# EAGLE board micromouse6.3 (EAGLE 7.5.0)
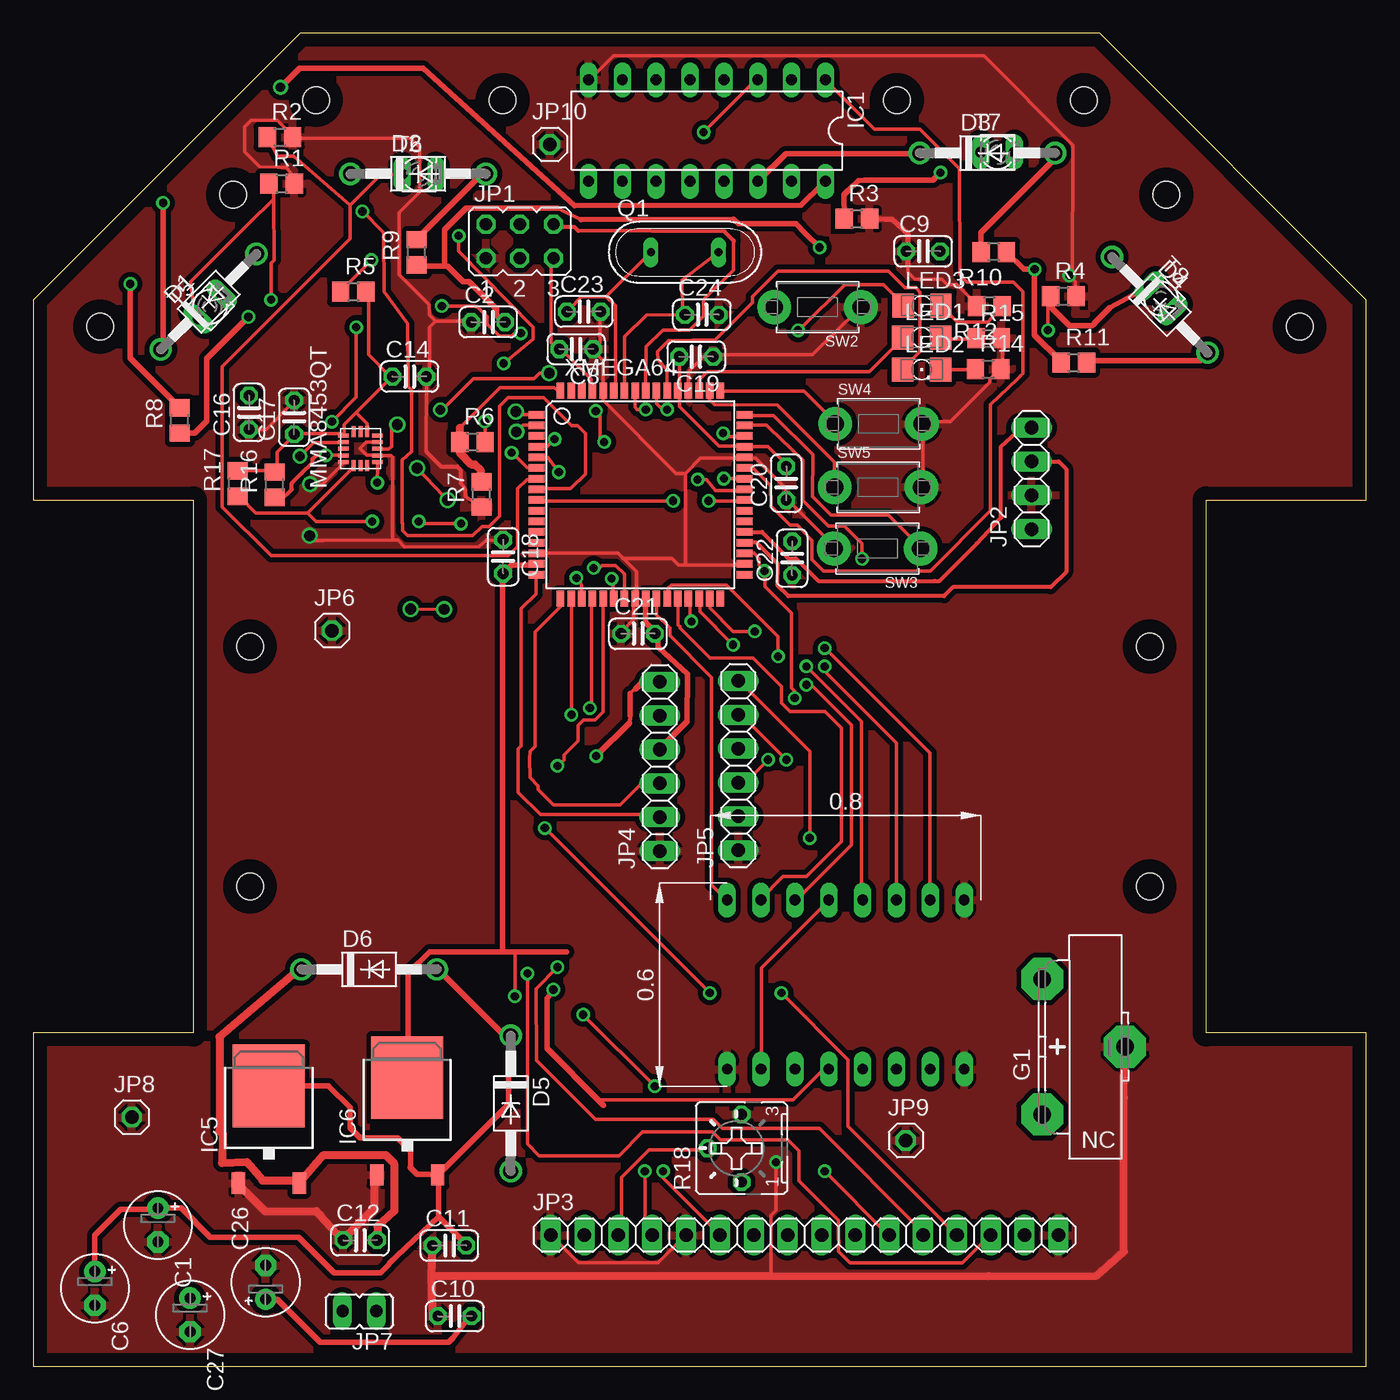
[diagram p0: board, top side]
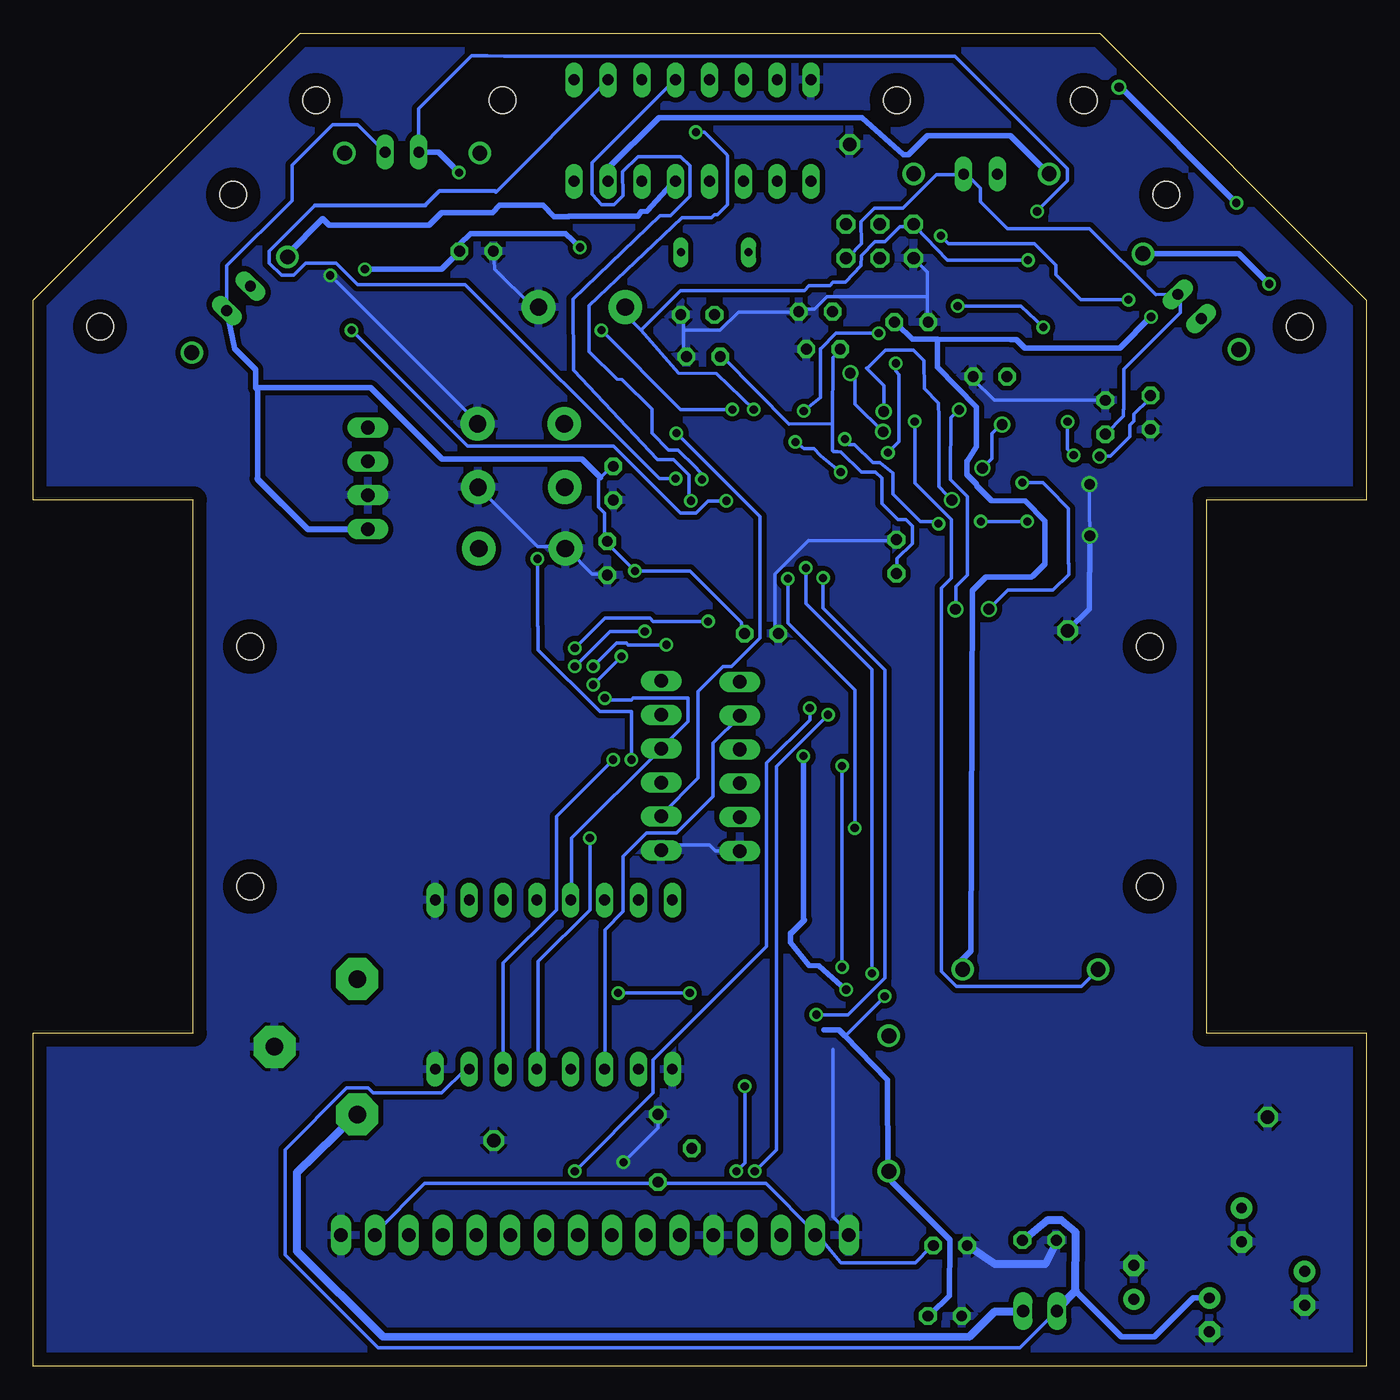
[diagram p1: board, bottom side, seen from below]

Size 100 x 100 mm. Coordinates in mm from the lower left corner, seen from the top.
Outline: 0,0 100,0 100,25 88,25 88,65 100,65 100,80 80,100 20,100 0,80 0,65 12,65 12,25 0,25 0,0
Copper layers (1*16): Top 0.035mm / dielectric 1.5mm / Bottom 0.035mm
Design rules "default *": minimum track width 10mil, minimum drill 24mil, track to track 15mil, track to pad 10mil, pad to pad 10mil, via to via 10mil, smd to smd 5mil, copper to edge 40mil, drill to drill 8mil, minimum pad ring 10mil, minimum via ring 8mil, stop-mask expansion 4mil, vias tented up to drill 0mil, thermal gap 10mil
Holes 2 mm at 95,78 85,87.9 78.8,95 64.8,95 21.2,95 35.2,95 5,78 15,87.9 83.75,54 83.75,36 16.25,54 16.25,36

## Footprints (pad centres in the part's own frame; a part is rotated, then mirrored left to right if it is on the bottom)
MMA8453QT = smd 0.813 x 0.305: BYP -1.275,0.5; DNC -1.275,0; GND1 -1.275,-1; GND2 1.275,0.5; GND3 1.275,-0.5; INT1 1.275,0; INT2 1.275,-1; NC3 1.275,1; SCL -1.275,-0.5; VDDIO -1.275,1 | smd 0.305 x 0.813: NC1 -0.5,1.275; NC2 0,1.275; NC4 0.5,-1.275; SA0 0,-1.275; SDA -0.5,-1.275; VDD 0.5,1.275
E2,5-5 = drill 0.813 pad 1.6: + -1.27,0 | drill 0.813 pad 1.6 octagon: - 1.27,0
C025-024X044 = drill 0.813 octagon: 1 -1.27,0; 2 1.27,0
DO41-10 = drill 1.118: A 5.08,0; C -5.08,0
1V60R = drill 1.321 pad 3.15 octagon: + -2.54,-5.08; +@1 -2.54,5.08; - 3.683,0
DIL16 = drill 0.813 long: 1 -8.89,-3.81; 2 -6.35,-3.81; 3 -3.81,-3.81; 4 -1.27,-3.81; 5 1.27,-3.81; 6 3.81,-3.81; 7 6.35,-3.81; 8 8.89,-3.81; 9 8.89,3.81; 10 6.35,3.81; 11 3.81,3.81; 12 1.27,3.81; 13 -1.27,3.81; 14 -3.81,3.81; 15 -6.35,3.81; 16 -8.89,3.81
TO252 = smd 1 x 1.6: 1 -2.28,-4.8; 2 2.28,-4.8 | smd 5.4 x 6.2: TAB 0,2.5
JP3Q = drill 0.914 octagon: 1 -2.54,-1.27; 2 -2.54,1.27; 3 0,-1.27; 4 0,1.27; 5 2.54,-1.27; 6 2.54,1.27
1X04 = drill 1.016 long: 1 -3.81,0; 2 -1.27,0; 3 1.27,0; 4 3.81,0
1X16 = drill 1.016 long: 1 -19.05,0; 2 -16.51,0; 3 -13.97,0; 4 -11.43,0; 5 -8.89,0; 6 -6.35,0; 7 -3.81,0; 8 -1.27,0; 9 1.27,0; 10 3.81,0; 11 6.35,0; 12 8.89,0; 13 11.43,0; 14 13.97,0; 15 16.51,0; 16 19.05,0
1X06 = drill 1.016 long: 1 -6.35,0; 2 -3.81,0; 3 -1.27,0; 4 1.27,0; 5 3.81,0; 6 6.35,0
1X01 = drill 1.016 octagon: 1 0,0
JP1 = drill 0.914 long: 1 0,-1.27; 2 0,1.27
1206 = smd 1.6 x 1.803: A -1.422,0; C 1.422,0
QS = drill 0.61 long: 1 -2.54,0; 2 2.54,0
R0805 = smd 1.3 x 1.5: 1 -0.95,0; 2 0.95,0
B25P = drill 0.813 octagon: A -2.54,0; E 2.54,0; S 0,2.54
TACT_PANA-EVQ = drill 1.3 pad 2.54: P$1 -3.25,0; P$2 3.25,0
BPX81 = drill 0.813 long: C 1.27,0; E -1.27,0
POLULU713 = drill 0.8 long: P$1 -13.97,3.81; P$2 -13.97,1.27; P$3 -13.97,-1.27; P$4 -13.97,-3.81; P$5 -13.97,-6.35; P$6 -13.97,-8.89; P$7 -13.97,-11.43; P$8 -13.97,-13.97; P$9 -1.27,-13.97; P$10 -1.27,-11.43; P$11 -1.27,-8.89; P$12 -1.27,-6.35; P$13 -1.27,-3.81; P$14 -1.27,-1.27; P$15 -1.27,1.27; P$16 -1.27,3.81
TQFP64 = smd 1.194 x 0.559: 1 -7.8,6; 2 -7.8,5.2; 3 -7.8,4.4; 4 -7.8,3.6; 5 -7.8,2.8; 6 -7.8,2; 7 -7.8,1.2; 8 -7.8,0.4; 9 -7.8,-0.4; 10 -7.8,-1.2; 11 -7.8,-2; 12 -7.8,-2.8; 13 -7.8,-3.6; 14 -7.8,-4.4; 15 -7.8,-5.2; 16 -7.8,-6; 33 7.8,-6; 34 7.8,-5.2; 35 7.8,-4.4; 36 7.8,-3.6; 37 7.8,-2.8; 38 7.8,-2; 39 7.8,-1.2; 40 7.8,-0.4; 41 7.8,0.4; 42 7.8,1.2; 43 7.8,2; 44 7.8,2.8; 45 7.8,3.6; 46 7.8,4.4; 47 7.8,5.2; 48 7.8,6 | smd 0.559 x 1.194: 17 -6,-7.8; 18 -5.2,-7.8; 19 -4.4,-7.8; 20 -3.6,-7.8; 21 -2.8,-7.8; 22 -2,-7.8; 23 -1.2,-7.8; 24 -0.4,-7.8; 25 0.4,-7.8; 26 1.2,-7.8; 27 2,-7.8; 28 2.8,-7.8; 29 3.6,-7.8; 30 4.4,-7.8; 31 5.2,-7.8; 32 6,-7.8; 49 6,7.8; 50 5.2,7.8; 51 4.4,7.8; 52 3.6,7.8; 53 2.8,7.8; 54 2,7.8; 55 1.2,7.8; 56 0.4,7.8; 57 -0.4,7.8; 58 -1.2,7.8; 59 -2,7.8; 60 -2.8,7.8; 61 -3.6,7.8; 62 -4.4,7.8; 63 -5.2,7.8; 64 -6,7.8

## Placement (x,y rotation side)
ACC1  MMA8453QT  [MMA8453QT]  24.54,68.83 0 top
C1  [E2,5-5]  9.35,10.59 270 top
C2  [C025-024X044]  34.13,78.33 0 top
C6  [E2,5-5]  4.62,5.84 270 top
C8  100n  [C025-024X044]  40.73,76.31 180 top
C9  [C025-024X044]  66.76,83.65 0 top
C10  10μ  [C025-024X044]  31.61,3.76 0 top
C11  100n  [C025-024X044]  31.21,9.05 0 top
C12  100n  [C025-024X044]  24.52,9.45 0 top
C14  4,7μ  [C025-024X044]  28.22,74.25 0 top
C16  0.1μ  [C025-024X044]  16.18,71.55 90 top
C17  0.1μ  [C025-024X044]  19.57,71.19 90 top
C18  100n  [C025-024X044]  35.25,60.74 270 top
C19  100n  [C025-024X044]  49.73,75.74 180 top
C20  100n  [C025-024X044]  56.49,66.25 90 top
C21  100n  [C025-024X044]  45.37,54.96 0 top
C22  100n  [C025-024X044]  56.94,60.62 90 top
C23  15p  [C025-024X044]  41.3,79.12 0 top
C24  15p  [C025-024X044]  50.16,78.89 0 top
C26  [E2,5-5]  17.43,6.29 90 top
C27  [E2,5-5]  11.76,3.85 270 top
D1  sfh4550  [DO41-10]  13.15,79.87 45 top
D2  sfh4550  [DO41-10]  28.87,89.46 0 top
D3  sfh4550  [DO41-10]  71.58,91.02 0 top
D4  sfh4550  [DO41-10]  84.52,79.63 315 top
D5  1N4004  [DO41-10]  35.82,19.71 270 top
D6  1N4004  [DO41-10]  25.19,29.77 0 top
G1  1V60R  [1V60R]  78.23,23.96 0 top
IC1  ULN2003AN  [DIL16]  50.54,92.7 180 top
IC5  LM1117IDTX-3.3  [TO252]  17.67,18.53 0 top
IC6  LM1117IDTX-3.3  [TO252]  28.05,19.15 0 top
JP1  [JP3Q]  36.5,84.41 0 top
JP2  [1X04]  74.89,66.61 90 top
JP3  [1X16]  57.86,9.84 0 top
JP4  [1X06]  47,45 90 top
JP5  [1X06]  52.89,45.06 90 top
JP6  [1X01]  22.41,55.19 0 top
JP7  [JP1]  24.47,4.13 90 top
JP8  [1X01]  7.39,18.68 0 top
JP9  [1X01]  65.46,16.93 0 top
JP10  [1X01]  38.76,91.67 0 top
LED1  [1206]  66.65,77.18 0 top
LED2  [1206]  66.65,74.77 0 top
LED3  [1206]  66.67,79.55 0 top
Q1  [QS]  48.88,83.57 0 top
R1  1k  [R0805]  18.63,88.73 0 top
R2  1k  [R0805]  18.5,92.21 0 top
R3  1k  [R0805]  61.79,86.09 0 top
R4  1k  [R0805]  77.28,80.27 0 top
R5  10k  [R0805]  24.01,80.61 0 top
R6  20k  [R0805]  32.95,69.35 0 top
R7  10k  [R0805]  33.62,65.4 90 top
R8  10  [R0805]  11,70.95 90 top
R9  10  [R0805]  28.76,83.56 90 top
R10  10  [R0805]  72.06,83.6 180 top
R11  10  [R0805]  78.06,75.3 0 top
R12  220  [R0805]  71.73,79.53 180 top
R14  220  [R0805]  71.64,74.82 0 top
R15  220  [R0805]  71.68,77.11 0 top
R16  4.7k  [R0805]  18.09,66.13 90 top
R17  4.7k  [R0805]  15.34,66.22 90 top
R18  [B25P]  53.14,16.35 90 top
SW2  [TACT_PANA-EVQ]  58.84,79.46 180 top
SW3  [TACT_PANA-EVQ]  63.33,61.35 180 top
SW4  [TACT_PANA-EVQ]  63.42,70.7 0 top
SW5  [TACT_PANA-EVQ]  63.38,65.95 0 top
T5  BPX81  [BPX81]  13.26,79.5 46.1 top
T6  BPX81  [BPX81]  28.93,89.44 0 top
T7  BPX81  [BPX81]  72.35,91.09 0 top
T8  BPX81  [BPX81]  84.6,80.12 314 top
U$1  POLULU713  [POLULU713]  55.87,36.25 90 top
XMEGA64  [TQFP64]  45.55,65.39 0 top

## Library data of the parts
ACC1 = MMA8453QT
C1 C2 C6 C8-C12 C14 C16-C24 C26 C27 R1-R12 R14-R17 = rcl
D1-D6 = diode
G1 = battery
IC1 = uln-udn
IC5 IC6 = lm1117
JP1 JP7 = jumper
JP2-JP6 JP8-JP10 = pinhead
LED1-LED3 = led
Q1 = special
R18 = pot
SW2-SW5 = adafruit
T5-T8 = opto-trans-siemens; OC_FARNELL: unknown; OC_NEWARK: unknown
U$1 = polulu
XMEGA64 = atmega-atxmega

## Nets
A_IN1: U$1.P$14 XMEGA64.27
A_IN2: U$1.P$15 XMEGA64.28
A_PWM: U$1.P$16 XMEGA64.26
AIN: R6.1 R7.2 XMEGA64.64
B_IN1: U$1.P$12 XMEGA64.30
B_IN2: U$1.P$11 XMEGA64.31
B_PWM: U$1.P$10 XMEGA64.29
CLK: JP1.2 R5.1 SW2.P$2 XMEGA64.57
CLK_: JP2.3 XMEGA64.36
DATA: JP1.6 XMEGA64.56
FOTRA1: R1.1 T5.E XMEGA64.6
FOTRA2: R2.1 T6.E XMEGA64.7
FOTRA3: R3.1 T7.E XMEGA64.8
FOTRA4: R4.1 T8.E XMEGA64.9
GND: ACC1.GND1 ACC1.GND2 ACC1.GND3 C1.- C2.1 C6.- C8.1 C9.1 C10.1 C11.1 C12.1 C14.2 C16.1 C17.2 C18.1 C19.1 C20.1 C21.1 C22.1 C23.2 C24.2 C26.- C27.- G1.- IC1.8 IC5.1 IC6.1 JP1.1 JP2.2 JP3.1 JP3.5 JP3.16 JP4.1 JP5.1 JP6.1 JP8.1 JP9.1 JP10.1 R1.2 R2.2 R3.2 R4.2 R7.1 R12.2 R14.2 R15.2 R18.E SW2.P$1 SW3.P$2 SW4.P$2 SW5.P$2 U$1.P$1 U$1.P$8 U$1.P$9 XMEGA64.14 XMEGA64.24 XMEGA64.34 XMEGA64.44 XMEGA64.52 XMEGA64.60
INT1: ACC1.INT1 XMEGA64.1
INT2: ACC1.INT2 XMEGA64.2
L_DIAG: IC1.1 XMEGA64.43
L_FROM: IC1.2 XMEGA64.42
MA_OUT1: JP4.5 U$1.P$3
MA_OUT2: JP4.6 U$1.P$4
MB_OUT1: JP5.5 U$1.P$6
MB_OUT2: JP5.6 U$1.P$5
N$1: LED1.A XMEGA64.51
N$2: D2.A R9.2
N$3: D1.A R8.2
N$4: D1.C IC1.16
N$5: D2.C IC1.15
N$6: D4.A R11.2
N$7: D3.C IC1.14
N$8: D3.A R10.2
N$9: D4.C IC1.13
N$10: LED2.A XMEGA64.54
N$12: JP3.13 XMEGA64.22
N$13: JP3.4 XMEGA64.18
N$14: JP3.6 XMEGA64.19
N$15: LED3.A XMEGA64.55
N$16: C23.1 Q1.1 XMEGA64.59
N$17: SW3.P$1 XMEGA64.48
N$18: G1.+ JP7.1
N$19: JP3.3 R18.S
N$20: C24.1 Q1.2 XMEGA64.58
N$21: SW4.P$1 XMEGA64.49
N$22: SW5.P$1 XMEGA64.50
N$23: JP3.11 XMEGA64.20
N$24: LED3.C R12.1
N$25: LED2.C R14.1
N$26: LED1.C R15.1
N$27: JP2.4 XMEGA64.37
N$30: ACC1.BYP C16.2
N$32: JP3.12 XMEGA64.21
N$34: JP3.14 XMEGA64.23
OUTA1: JP4.2 XMEGA64.16
OUTA2: JP4.3 XMEGA64.17
OUTB1: JP5.2 XMEGA64.46
OUTB2: JP5.3 XMEGA64.47
R_DIAG: IC1.3 XMEGA64.41
R_FRONT: IC1.4 XMEGA64.40
SA0: ACC1.SA0
SAO: XMEGA64.3
SCL: ACC1.SCL R16.1 XMEGA64.5
SDA: ACC1.SDA R17.1 XMEGA64.4
VCC3: ACC1.VDD ACC1.VDDIO C8.2 C10.2 C14.1 C17.1 C18.2 C19.2 C20.2 C21.2 C22.2 C26.+ D5.A IC6.TAB JP1.5 JP2.1 JP4.4 JP5.4 R5.2 R16.2 R17.2 T5.C T6.C T7.C T8.C U$1.P$2 U$1.P$13 XMEGA64.15 XMEGA64.25 XMEGA64.35 XMEGA64.45 XMEGA64.53 XMEGA64.61
VCC5: C1.+ C2.2 C6.+ C9.2 C11.2 D5.C D6.A IC5.TAB IC6.2 JP3.2 JP3.15 R8.1 R9.1 R10.1 R11.1 R18.A
VCC7: C12.2 C27.+ D6.C IC5.2 JP7.2 R6.2 U$1.P$7

## Tracks (layer width: path | path; a pad name or v marks a point on that pad's centre or on a via)
A_IN1  (via drill 0.61)
  Top 0.254: v55.88,53.25 55.88,54.75 52,58.62 47.88,58.62 47.62,58.38 47.62,57.62 XMEGA64.27 | v58,51.12 58.38,51.12 61.38,48.12 61.38,39.12 57.25,35 U$1.P$14
  Bottom 0.254: v58,51.12 v55.88,53.25
A_IN2
  Top 0.254: XMEGA64.28 48.38,57.5 48.38,55.62 48.5,55.5 48.5,55.38 50.75,53.12 54,53.12 56.12,51 56.12,49.75 56.75,49.12 59.38,49.12 60.62,47.88 60.62,39.38 58,36.75 56.25,36.75 54.5,35 U$1.P$15
A_PWM
  Top 0.254: XMEGA64.26 46.75,56.38 47.75,55.38 47.75,54.81 50.89,51.68 50.88,36.12 52,35 U$1.P$16
AIN
  Top 0.254: 32,70.41 34.87,73.27 35.03,73.43 39.07,73.43 39.31,73.19 XMEGA64.64 39.57,73.26 | 32,69.49 R6.1 32,69.27 | 33.6,66.52 R7.2
  Top 0.61: 32,69.49 32,70.41 | 32,69.27 32,68.52 32.86,67.66 33.14,67.66 33.55,67.25 33.55,66.43 R7.2
B_IN1  (via drill 0.61)
  Top 0.254: v52.5,54.12 50,56.62 50,57.5 XMEGA64.30 | v58,52.5 62.12,48.38 62.12,35 U$1.P$12
  Bottom 0.254: v52.5,54.12 55.38,54.12 55.5,54.25 56.25,54.25 v58,52.5
B_IN2  (via drill 0.61)
  Top 0.254: XMEGA64.31 50.75,56.88 52.5,55.12 v54.12,55.12 | v59.38,52.5 59.38,52.12 64.75,46.75 64.75,35 U$1.P$11
  Bottom 0.254: v54.12,55.12 56.75,55.12 v59.38,52.5
B_PWM  (via drill 0.61)
  Top 0.254: v49.38,55.88 49.25,56 49.25,57.5 XMEGA64.29 | v59.38,53.88 67.25,46 67.25,35 U$1.P$10
  Bottom 0.254: v49.38,55.88 53.5,55.88 53.75,56.12 57.12,56.12 v59.38,53.88
CLK  (via drill 0.61)
  Top 0.254: v25.38,82.98 23.09,80.7 R5.1 | 45.26,73.15 XMEGA64.57 45.15,71.94 45.31,71.78 v45.95,71.78
  Bottom 0.254: v25.38,82.98 31.43,83 33.83,85.5 JP1.2 34.06,85.5 34.98,85.5 36.12,84.35 36.87,84.35 37.88,83.31 37.9,82.57 39.06,81.33 39.14,81.33 39.99,81.32 40.24,81.07 41.79,81.07 42.14,80.71 43.27,80.71 51.44,80.7 54.41,77.72 | v45.95,71.78 48.73,74.49 51.59,74.49 54.41,77.72 | 54.41,77.72 55.55,78.87 55.55,79.32 SW2.P$2
CLK_
  Top 0.305: JP2.3 76.93,67.88 77.5,67.32 77.5,59.6 76.34,58.44 68.99,58.44 68.32,57.77 56.65,57.77 55.84,58.57 55.85,60.17 55.16,60.88 55.34,60.7 54.24,61.79 XMEGA64.36
DATA
  Top 0.254: 52.54,84.39 52.54,82.23 50.29,80.01 50.29,78.77 49.22,77.73 47.23,77.72 45.99,76.48 45.95,73.38 XMEGA64.56 | 39.09,85.5 JP1.6
  Top 0.305: 52.54,84.39 52.54,84.46 51.87,85.14 40.88,85.19 40.6,85.47 39.26,85.45 JP1.6
FOTRA1  (via drill 0.61)
  Top 0.254: v35.88,68.54 36.35,68.12 37.03,67.44 37.72,67.44 XMEGA64.6 | v35.29,75.23 37.49,77.04 37.49,77.95 31.9,83.67 v31.91,84.81 | v17.83,80.01 17.83,82.75 18.06,82.98 18.04,87.57 | 18.04,87.57 18.06,88.92 17.76,88.28 R1.1 | 18.04,87.57 16.21,85.74 16.09,85.64 11.81,81.37 11.95,80.1 11.94,79.5
  Top 0.406: T5.E 11.94,79.5
  Bottom 0.254: v31.91,84.81 31.33,84.23 24.9,84.23 23.28,82.61 23.28,81.9 21.4,80.01 v17.83,80.01 | v35.29,75.23 35.29,74.64 35.04,74.4 35.05,70.91 35.05,70.92 35.05,69.38 v35.88,68.54
FOTRA2
  Top 0.254: 23.77,87.1 23.77,84.58 14.17,74.98 14.17,64.47 17.83,60.81 35.66,60.81 36.35,61.49 36.35,65.84 37.03,66.52 37.72,66.52 XMEGA64.7 | 23.77,87.1 26.06,89.38 27.2,89.38 27.26,89.44 T6.E | 23.77,87.1 19.54,90.77 18.34,90.77 17.6,92.13 R2.1
FOTRA3  (via drill 0.61)
  Top 0.254: v24.69,86.64 26.29,85.04 26.31,80.62 28.08,78.21 28.12,74.07 28.12,73.5 28.39,73.23 28.39,68.64 27.68,67.99 27.69,63.27 27.69,63.26 27.69,62.7 28.08,62.31 32.97,62.31 33.66,63 34.2,63 34.98,63.78 34.98,72.04 35.6,72.67 38.3,72.67 40.38,70.58 40.84,70.58 41.44,69.98 41.44,66.95 40.32,65.84 37.95,65.84 XMEGA64.8
  Top 0.406: R3.1 60.82,87.88 61.16,88.22 61.89,88.96 62.34,88.97 66.45,88.97 67.48,88.97 v68.06,89.55
  Bottom 0.254: v24.69,86.64 22.4,88.92 22.4,89.84 30.86,98.3 64.69,98.3 65.91,98.3 67.12,98.31 71.08,94.36 T7.E
  Bottom 0.406: v68.06,89.55 69.6,91.09 T7.E
FOTRA4  (via drill 0.61)
  Top 0.254: v48.01,64.92 37.95,64.92 XMEGA64.9 | v76.12,77.72 76.12,80.24 R4.1
  Top 0.406: R4.1 76.33,79.47 77.74,78.05 79.47,78.05 79.59,78.18 79.59,78.25 80.77,79.42 T8.E
  Bottom 0.254: v48.01,64.92 49.38,64.92 50.29,64.01 51.44,64.01 56.46,69.04 67.44,69.04 v76.12,77.72
GND  (via drill 0.61, 0.8)
  Top 0.254: C17.2 19.43,72.24 17.48,70.28 C16.1 | 29.48,68.64 29.49,74.1 C14.2 29.72,74.3 29.72,77.95 30.18,78.41 | 33.6,64.47 R7.1 | 65.61,82.53 C9.1 65.61,82.3 65.61,82.09 66.13,81.57 68.17,81.57 68.6,81.14 69.31,81.14 70.36,80.09 | C23.2 42.52,79.1 42.52,76.81 42.06,76.35 C8.1 42.06,76.12 42.75,75.44 42.75,73.38 XMEGA64.60 42.75,73.15 42.75,72.47 48.23,66.98 48.92,66.98 | XMEGA64.52 49.15,73.38 49.15,74.61 50.29,75.75 C19.1 51.21,75.89 56.92,75.89 58.47,75.9 61.95,79.32 SW2.P$1 | R1.2 19.34,89.47 18.97,89.97 18.32,89.97 16.98,89.99 16.62,90.35 15.87,91.11 15.87,92.99 16.36,93.5 16.9,93.5 16.92,93.5 18.29,93.5 19.43,92.35 R2.2 19.66,92.13 26.19,92.13 26.2,92.12 28.29,92.12 28.96,91.44 28.96,88.08 27.44,86.55 27.44,85.58 27.43,85.58 27.43,81.89 29.7,79.64 29.72,78.87 30.18,78.41 | 30.18,78.41 32.69,78.41 C2.1 | JP3.1 38.86,9.83 40.92,7.77 46.86,7.77 48.92,9.83 JP3.5 | 25.83,68.35 ACC1.GND3 | C18.1 35.2,61.95 34.02,61.97 33.45,61.49 27.84,61.47 27.35,61.97 27.11,61.97 | C21.1 44.12,55.09 45.03,56.01 45.03,57.38 XMEGA64.24 45.26,57.61 45.26,58.29 45.27,59.6 44.06,60.8 | 48.92,60.12 53.26,60.12 XMEGA64.34 | 44.06,60.8 43.87,60.99 38.16,60.99 XMEGA64.14 | SW3.P$2 60.12,61.49 56.69,64.92 C20.1 56.46,65.15 56.46,65.84 54.18,68.12 53.49,68.12 XMEGA64.44 53.26,68.12 50.06,68.12 48.92,66.98 | R15.2 72.69,77.04 72.69,74.98 R14.2 72.47,74.75 71.78,74.07 71.78,73.84 68.81,70.87 66.75,70.87 SW4.P$2 66.75,70.64 66.75,66.06 SW5.P$2 | 77.95,81.61 78.18,81.38 78.18,80.47 R4.2 | 77.95,81.61 77.98,91.62 71.31,98.32 43.52,98.32 41.98,96.78 41.83,96.7 IC1.8 | 77.95,81.61 v77.72,81.84
  Top 0.254: 48.92,66.98 48.92,60.12 | ACC1.GND2 24.96,69.33 24.52,68.89 24.52,68.83 25,68.35 25.8,68.35 ACC1.GND3 | ACC1.GND1 23.27,67.75 21.71,66.2 20.79,66.2 v20.76,66.17 | v20.73,62.3 21.07,61.96 21.77,61.96 27.11,61.97 | 48.92,60.12 48.4,60.12 47.93,60.6 44.26,60.58 44.06,60.8 | 15.54,13.72 IC5.1 | 30.18,3.89 29.95,4.12 | 29.95,8.91 C11.1 | 25.6,14.17 IC6.1 | 23.32,9.6 C12.1 23.09,9.6 | 81.84,23.77 G1.- | v55.73,15.3 55.73,11.7 55.33,11.3 55.33,6.79 55.35,6.77 | 27.11,61.97 26.96,62.02 26.96,68.19 26.84,68.32 25.83,68.32 ACC1.GND3 | ACC1.GND3
  Top 0.305: 29.48,68.64 29.74,68.35 30.6,67.5 31.8,67.5 32.07,67.22 32.06,66.39 32.06,66.24 32.38,65.81 32.38,65.67 32.39,65.28 R7.1
  Top 0.406: 65.61,82.53 65.61,84.17 65.61,84.97 64.44,86.07 64.41,86.07 63.88,86.07 R3.2
  Top 0.61: 29.95,4.12 29.89,6.79 | 29.89,6.79 29.95,8.91 | 30.18,3.89 C10.1 | 25.6,14.17 25.6,11.89 23.32,9.6 | 81.84,23.77 81.82,20.16 81.83,8.6 79.76,6.78 71.66,6.76 55.35,6.77 29.89,6.79 | 23.09,9.6 21.53,11.32 21.23,11.63 17.39,11.63 15.54,13.47 15.54,13.72
  Bottom 0.254: C17.2 19.66,72.47 27.89,72.47 29.49,74.07 C14.2 | SW2.P$1 62.18,79.55 62.64,79.55 65.38,82.3 C9.1 | 51.21,77.72 51.21,75.89 C19.1 | 51.21,77.72 51.21,78.87 C24.2 | 51.21,77.72 48.46,77.72 47.09,79.1 42.75,79.1 C23.2 42.52,79.32 41.38,79.32 40.46,80.24 32.92,80.24 | 32.92,80.24 32.92,82.07 33.83,82.98 JP1.1 | 32.92,80.24 32.92,78.41 C2.1 | 40.01,23.77 40.01,11.2 38.86,10.06 JP3.1 | C18.1 35.43,61.95 41.83,61.95 44.35,59.44 44.35,55.32 44.12,55.09 C21.1 | C22.1 57.15,59.44 58.06,59.44 59.89,61.27 SW3.P$2 60.12,61.49 62.18,61.49 66.52,65.84 SW5.P$2 | v77.72,81.84 66.75,70.87 SW4.P$2 | v20.76,66.17 20.76,64.39 v20.73,62.3 | 29.72,8.91 C11.1 | 23.19,9.37 C12.1 | JP4.1 48.82,38.65 49.27,39.09 52.51,39.09 JP5.1 | R18.E 53.14,17.89 v55.73,15.3
  Bottom 0.406: JP6.1 20.77,56.8 v20.73,62.3
  Bottom 0.61: 29.72,8.91 27.84,7.65 26.33,7.65 24.08,7.65 23.19,9.37
  pour Top (isolate 0.254): 0.23,0 0.31,24.67 12.29,25.1 12.06,64.84 0,64.84 0.23,80.41 20.18,100.17 80.93,99.7 100.18,79.95 100.18,64.61 88.35,64.84 88.12,24.64 99.95,24.87 99.72,-0.47 0.27,0.35
  pour Bottom: 0.3,0.38 0.3,0.38 0.33,24.67 12.29,25.1 12.29,65.07 -0.46,65.07 -0.46,66 0.23,66 0.23,79.48 20.41,99.93 80.24,99.93 100.41,79.48 100.41,65.07 88.35,65.07 88.12,24.64 99.95,25.1 99.95,0 0.23,0
INT1  (via drill 0.8)
  Top 0.254: XMEGA64.1 36.43,71.39 v36.2,71.62 | v31.09,64.98 30.79,65.27 v28.8,67.38 | 25.85,68.84 ACC1.INT1 26.67,68.82 26.86,69.01 26.86,70.38 27.13,70.64 v27.31,70.64
  Bottom 0.254: v36.2,71.62 36.2,73.57 37.51,74.89 37.41,74.89 36.06,76.22 33.97,76.23 33.17,75.44 33.16,73.33 32.09,72.26 32.07,71.14 32.07,65.99 31.49,65.41 v31.09,64.98 | v28.8,67.38 28.95,67.21 28.08,68.08 28.08,69.98 27.41,70.64 v27.31,70.64
INT2  (via drill 0.61, 0.7, 0.8)
  Top 0.254: ACC1.INT2 25.82,67.57 v25.81,66.29 | v28.31,56.8 v30.81,56.79 | XMEGA64.2 36.75,70.59 v36.24,70.11 | v30.54,71.76 30.69,71.76 33.02,74.08 37.57,74.08 37.99,74.5 v38.7,74.5
  Bottom 0.254: v28.31,56.8 26.9,58.22 23.49,58.22 22.32,59.38 22.32,60.21 22.34,60.23 22.34,64.35 23.82,65.84 24.26,66.29 v25.81,66.29 | v36.24,70.11 38.35,72.19 38.35,74.26 v38.7,74.5 | v30.54,71.76 30.54,71.77 31.14,71.17 31.18,66.88 31.18,66.53 29.91,65.25 29.91,59.37 30.77,58.51 30.78,57.06 v30.81,56.79
L_DIAG
  Top 0.254: IC1.1 59.44,96.47 63.09,92.81 66.52,92.81 69.49,89.84 69.51,81.89 70.05,81.35 73.52,81.35 74.23,80.63 74.23,74.47 74.06,74.31 74.06,74.29 73.84,74.07 71.79,72.15 71.8,64.2 67.29,59.67 59.44,59.66 59.28,59.66 58.42,60.53 58.42,61.94 58.29,62.07 57.33,63.09 56.76,63.09 55.33,64.53 55.32,66.06 54,67.39 XMEGA64.43
L_FROM  (via drill 0.61)
  Top 0.254: XMEGA64.42 53.26,66.52 53.19,66.59 v51.81,66.59
  Bottom 0.254: 78.87,87.1 82.3,83.67 82.3,82.75 81.38,81.84 80.47,81.84 79.55,82.75 77.27,82.75 75.67,81.15 67.59,81.15 53.03,66.59 v51.81,66.59 | 65.3,88.09 56.92,96.47 IC1.2
  Bottom 0.305: 78.87,87.1 70.6,87.1 69.5,88.19 65.39,88.19 65.3,88.09
MA_OUT1
  Bottom 0.254: U$1.P$3 57.12,22.38 57.12,32.75 55.75,34.12 55.75,38.25 54,40 51.75,40 49,42.75 49,46.75 47,48.75 JP4.5
MA_OUT2  (via drill 0.61)
  Top 0.254: JP4.6 46.86,51.21 45.59,51.21 | 45.18,50.79 45.11,50.79 44.76,50.46 | 44.76,48.48 44.74,48.27 | U$1.P$4 59.62,22.25 59.25,22.25 57,20 42.62,20 42.48,19.86
  Top 0.305: 44.76,48.8 44.76,48.48
  Top 0.406: 42.76,19.57 42.48,19.86 38.55,23.86 38.55,27.58 v39.02,28.25 | 45.59,51.21 45.18,50.79 | 44.76,50.46 44.76,48.8 | 44.74,48.27 v42.22,45.77
  Bottom 0.254: 43.16,32.51 43.14,32.51 | 42.22,33.57 42.15,33.49
  Bottom 0.406: v39.02,28.25 41.07,30.04 41.81,30.07 43.2,31.77 43.2,32.47 43.16,32.51 | 43.14,32.51 42.15,33.49 | v42.22,45.77 42.22,33.57
MB_OUT1  (via drill 0.61)
  Top 0.254: v56.5,45.5 53.25,48.75 53,48.75 JP5.5
  Bottom 0.254: v56.5,45.5 60.75,41.25 60.75,34.25 64.75,30.25 64.75,22.38 U$1.P$6
MB_OUT2  (via drill 0.61)
  Top 0.254: v58.25,39.62 58.25,46.12 53,51.38 JP5.6
  Bottom 0.254: v58.25,39.62 58.25,34.25 62.12,30.38 62.12,22.38 U$1.P$5
N$1
  Top 0.254: 50.06,73.38 XMEGA64.51 49.95,74 50.56,74.62 50.87,74.62 62.73,74.61 65.15,77.04 LED1.A
N$2
  Top 0.254: 28.8,84.58 R9.2
  Top 0.406: 28.8,84.58 33.83,89.61 D2.A
N$3  (via drill 0.61)
  Top 0.406: R8.2 7.28,75.62 v7.28,81.2
  Bottom 0.406: v7.28,81.2 9.54,83.46 D1.A
N$4  (via drill 0.61, 0.7)
  Top 0.254: 59.21,88.7 IC1.16
  Top 0.406: 59.21,88.7 57.61,87.1 40.62,87.06 29.25,97.38 19.98,97.38 v18.55,95.95 | D1.C 9.73,76.45 v9.73,87.27
  Bottom 0.406: v9.73,87.27 18.41,95.95 v18.55,95.95
N$5
  Bottom 0.254: 56.95,89.81 56.69,88.92 IC1.15 | 24,89.61 D2.C
  Bottom 0.406: 56.95,89.81 53.06,93.65 37.85,93.66 34.73,90.89 34.34,90.89 32.91,92.32 26.7,92.32 25.22,90.84 24,89.61
N$6
  Top 0.254: 87.55,75.44 88.01,75.89 D4.A | 79.1,75.44 R11.2
  Top 0.406: 87.55,75.44 79.1,75.44
N$7
  Top 0.254: 54.41,88.92 IC1.14 | 66.29,90.98 D3.C
  Top 0.406: 54.41,88.92 56.46,90.98 66.29,90.98
N$8
  Top 0.406: D3.A 76.66,90.59 71.11,85.04 R10.2
N$9
  Bottom 0.254: 51.89,88.7 IC1.13 | 80.92,83.44 D4.C
  Bottom 0.406: 51.89,88.7 52.15,88.66 53.94,86.66 54.41,86.64 54.62,86.28 59.82,86.29 59.84,86.26 60.93,86.26 61.76,87.09 65.02,87.09 65.55,86.55 65.56,86.55 69.37,86.55 70.31,85.61 77.82,85.61 78.29,86.08 80.92,83.44
N$10
  Top 0.254: XMEGA64.54 47.55,73.38 47.54,74.77 46.85,75.46 46.84,76.12 47.65,76.95 51.19,77.03 53.95,79.78 53.95,80.24 55.32,81.61 55.85,82.14 63.45,82.14 63.53,82.14 63.64,82.16 64.14,82.16 65.38,80.92 66.21,80.92 66.53,80.6 66.52,76.12 65.38,74.98 LED2.A
N$12  (via drill 0.61)
  Top 0.254: v43.39,59.08 43.5,58.88 43.5,57.62 XMEGA64.22 | v50.75,28 v38.38,40.38 | v56.12,28 61.12,23 61.12,18 69.25,9.88 JP3.13
  Bottom 0.254: v43.39,59.08 43.38,55.75 38.38,50.75 v38.38,40.38 | v56.12,28 v50.75,28
N$13  (via drill 0.61)
  Top 0.254: v40.38,48.88 40.38,57.5 XMEGA64.18 | v45.88,14.62 45.88,10.38 46.38,9.88 JP3.4
  Bottom 0.254: v40.38,48.88 44.25,45 44.25,16.25 v45.88,14.62
N$14  (via drill 0.61)
  Top 0.254: v40.75,59.14 41.12,58.62 41.12,57.62 XMEGA64.19 | v46.62,21 v41.25,26.38 | v47.25,14.62 47.25,14.12 51.5,9.88 JP3.6
  Bottom 0.254: v40.75,59.14 40.75,56.88 36.12,52.25 36.12,29.12 38.88,26.38 v41.25,26.38 | v46.62,21 46.62,15.25 v47.25,14.62
N$15  (via drill 0.61)
  Top 0.254: v57.38,77.72 57.58,77.88 60.9,81.15 63.78,81.15 65.15,79.78 LED3.A | 46.86,73.15 XMEGA64.55 46.76,73.18 46.76,72.21 47.19,71.78 v47.55,71.78
  Bottom 0.254: v47.55,71.78 51.44,71.78 v57.38,77.72
N$16
  Top 0.254: 42.98,80.24 43.66,79.55 43.66,73.38 XMEGA64.59 | 42.98,80.24 41.15,80.24 40.23,79.32 C23.1 | 42.98,80.24 46.18,83.44 Q1.1
N$17
  Top 0.254: XMEGA64.48 53.49,71.32 55.53,71.32 58.48,68.4 58.47,65.23 59.85,63.85 64.16,63.85 66.52,61.49 SW3.P$1
N$18
  Bottom 0.254: 25.83,4.12 JP7.1 | 75.89,18.75 G1.+
  Bottom 0.61: 25.83,4.12 27.84,4.12 29.78,2.22 73.78,2.24 80.23,8.65 80.23,14.51 75.89,18.75
N$19
  Top 0.254: R18.S 50.52,16.23 46.18,16.23 44.12,14.17 44.12,10.06 JP3.3
N$20
  Top 0.254: XMEGA64.58 44.35,73.38 44.35,77.24 45.99,78.87 C24.1 48.69,79.1 48.68,81.48 51.21,83.44 Q1.2
N$21
  Top 0.254: XMEGA64.49 51.66,73.15 57.84,73.15 60.12,70.87 SW4.P$1
N$22
  Top 0.254: XMEGA64.50 50.75,73.15 50.75,72.47 51.1,72.14 55.84,72.11 60.12,67.83 60.12,66.06 SW5.P$1
N$23  (via drill 0.61)
  Top 0.254: v41.75,49.38 41.88,49.5 41.88,57.5 XMEGA64.20 | v59.38,14.62 64.12,9.88 JP3.11
  Bottom 0.254: v41.75,49.38 41.75,48.5 45,45.25 45,31.5 53.5,23 53.5,20.5 v59.38,14.62
N$24
  Top 0.254: R12.1 72.47,79.32 71.62,78.33 69.32,78.33 LED3.C 68.12,79.55
N$25
  Top 0.254: R14.1 70.64,74.75 68.12,74.75 LED2.C
N$26
  Top 0.254: R15.1 70.64,77.04 68.12,77.04 LED1.C
N$27
  Top 0.305: XMEGA64.37 54.68,62.59 55.7,61.57 56.66,60.61 57.2,60.61 58.89,58.92 67.62,58.92 67.98,58.92 70.78,61.73 72.6,63.65 72.61,69.01 74.16,70.41 74.88,70.41 JP2.4
N$30  (via drill 0.7)
  Top 0.254: ACC1.BYP 23.23,69.3 22.55,69.3 21.02,69.3 v20,68.27
  Bottom 0.254: v20,68.27 19.19,68.27 17.73,69.73 17.73,70.41 17.73,70.42 17.73,70.6 17.41,70.91 17.41,71.42 16.32,72.51 C16.2
N$32  (via drill 0.61)
  Top 0.254: v39.32,29.94 37.73,28.32 37.74,22.95 42.2,18.52 51.03,18.52 51.72,17.83 58.98,17.83 66.75,10.06 JP3.12 | XMEGA64.21 42.75,57.38 42.75,49.08 42.21,48.56 42.13,48.48 41.27,48.48 40.86,48.06 40.86,46.91 40.29,46.34 39.81,45.87 39.81,45.48 v39.32,45.03
  Bottom 0.254: v39.32,29.94 v39.32,45.03
N$34  (via drill 0.61)
  Top 0.254: v37.07,29.46 37.07,16.67 37.96,15.78 43.93,15.78 45.71,17.57 46.66,17.57 46.62,17.57 50.94,17.58 51.54,16.98 56.62,16.98 57.46,16.14 57.46,13.9 60.37,10.99 60.42,10.96 60.42,9.47 60.44,9.45 60.41,8.69 60.41,8.63 61.27,7.77 69.72,7.77 71.78,9.83 JP3.14 | XMEGA64.23 44.35,57.61 44.35,59.44 43.7,60.09 42.66,60.09 42.47,59.89 v42.04,59.89 42.31,59.89
  Bottom 0.254: v42.04,59.89 42.03,57.23 37.06,52.26 v37.07,29.46
OUTA1
  Top 0.254: XMEGA64.16 37.72,59.21 37.72,57.94 36.61,56.83 36.59,46.53 36.36,46.3 36.38,43.04 38.04,41.38 46.86,41.38 JP4.2
OUTA2
  Top 0.254: XMEGA64.17 39.55,57.38 39.55,56.99 37.65,55.09 37.65,48.24 37.66,46.51 37.26,46.11 37.24,45.58 37.25,44.17 37.88,43.54 37.88,43.25 39.04,42.09 44.01,42.09 45.58,43.66 46.86,43.66 JP4.3
OUTB1  (via drill 0.61)
  Top 0.254: v51.75,70 52,69.75 53.25,69.75 XMEGA64.46
  Bottom 0.254: v51.75,70 45.5,63.75 45.5,54.62 47.62,52.5 48.25,52.5 50.12,50.62 50.12,44.12 52.88,41.38 JP5.2
OUTB2  (via drill 0.61)
  Top 0.254: v62.18,60.58 62.18,61.72 60.86,63.03 59.65,63.05 57.74,64.95 57.74,67.97 55.24,70.36 55.02,70.59 XMEGA64.47 | v55.12,45.5 53.5,43.88 53,43.88 JP5.3
  Bottom 0.254: v62.18,60.58 62.18,55.55 62.12,55.5 62.12,53.75 57.5,49.12 55.12,49.12 v55.12,45.5
R_DIAG  (via drill 0.61)
  Top 0.254: v49.84,66.52 50.52,66.52 51.17,65.69 53,65.69 XMEGA64.41 | v50.29,92.58 54.18,96.47 IC1.3
  Bottom 0.254: v49.84,66.52 49.77,66.83 50.34,67.46 51.63,68.75 52.33,68.75 53.59,70 53.59,70.02 53.59,70.28 53.59,71.79 55.82,74.02 56.23,74.05 58.29,76.11 58.29,79.55 51.33,86.17 50.67,86.16 49.12,86.16 48.88,86.4 48.67,86.4 47.91,87.16 47.91,90.82 48.01,90.92 49.64,92.57 v50.29,92.58
R_FRONT  (via drill 0.61)
  Top 0.254: v50.67,64.92 53.26,64.92 XMEGA64.40
  Bottom 0.254: IC1.4 51.89,96.47 58.06,90.3 58.09,87.93 57.38,87.14 56.45,87.15 55.76,87.83 55.78,89.61 54.63,90.75 51.44,90.75 50.75,90.07 50.75,87.78 52.21,86.33 52.98,86.33 59.51,80.07 59.48,74.73 53.16,68.02 52.05,68.03 51.98,68.03 50.81,66.86 50.81,65.06 arc-90 v50.67,64.92
SCL  (via drill 0.61)
  Top 0.254: 21.26,68.35 v21.95,68.35 23.09,68.35 ACC1.SCL | 18.54,64.94 R16.1 | v42.2,71.66 42.52,71.27 42.52,69.65 v42.82,69.34 | v36.58,77.5 36.12,77.5 35.89,77.27 34.98,77.27 34.06,78.18 34.06,78.55 34.06,78.63 34.06,78.74 33.29,79.51 33.17,79.51 33.16,79.53 v30.65,79.54 | v24.23,77.95 24.23,72.69 v22.4,70.87 | v39.42,67.08 38.61,68.17 37.77,68.17 XMEGA64.5
  Top 0.305: 18.54,64.94 19.39,65.78 19.38,66.24 20.14,66.99 20.95,67.8 20.95,68.06 21.26,68.35
  Bottom 0.254: v42.82,69.34 42.2,68.85 41.44,68.85 40.93,68.33 40.07,67.6 v39.42,67.08 | v42.2,71.66 40.93,72.68 40.93,76.35 40.92,76.35 39.78,77.5 v36.58,77.5 | v30.65,79.54 25.9,79.54 v24.23,77.95 | v22.4,70.87 22.4,68.81 v21.95,68.35
SDA  (via drill 0.61)
  Top 0.254: 20.57,64.01 24,67.44 ACC1.SDA | 20.57,64.01 16.69,64.01 15.54,65.15 R17.1 | XMEGA64.4 37.95,69.04 38.59,69.04 v39.11,69.56 | v25.43,63.38 21.21,63.38 20.57,64.01 | v32.08,63.21 29.09,63.21 v28.91,63.38
  Bottom 0.254: v25.43,63.38 v28.91,63.38 | v39.11,69.56 38.8,69.16 38.38,69.16 37,67.79 36.49,67.78 35.51,66.99 35.5,65.43 34.95,64.89 33.45,63.37 32.25,63.37 v32.08,63.21
VCC3  (via drill 0.61)
  Top 0.254: 32.69,3.66 C10.2 | 28.12,21.72 IC6.TAB | R5.2 25.15,80.47 25.15,75.89 26.75,74.3 C14.1 26.75,74.07 24.23,71.55 | R17.2 15.54,67.21 18.06,67.21 R16.2 18.29,67.21 18.29,68.58 19.43,69.72 C17.1 19.66,69.95 23.09,69.95 ACC1.VDDIO 23.32,69.95 23.32,70.64 24.23,71.55 | 37.72,60.12 XMEGA64.15 | 35.43,59.66 C18.2 35.2,59.44 | XMEGA64.61 41.83,73.38 41.83,74.07 39.55,76.35 C8.2 39.32,76.35 38.86,76.81 38.86,82.98 JP1.5 | 45.95,57.38 XMEGA64.25 | 46.63,55.09 C21.2 | 47.09,46.41 JP4.4 | C19.2 48.46,75.67 48.46,73.38 XMEGA64.53 48.46,73.15 48.46,72.01 51.44,69.04 53.26,69.04 XMEGA64.45 53.3,69 55.13,69 56.46,67.67 C20.2 | ACC1.VDD 25.04,70.73 24.23,71.55 | v57.12,50.12 57.12,50.62 56.88,50.88 56.88,56.5 54.88,58.5 54.88,59.62 v54.86,59.66 54.45,60.12 54.45,60.61 54.08,60.99 XMEGA64.35 | U$1.P$2 54.62,22.38 54.62,29.88 59.62,34.88 U$1.P$13 | v36.12,27.75 36.12,31.09
  Top 0.406: 32.69,3.66 31.44,2.09 31.17,1.81 21.5,1.81 18.29,5.02 C26.+ | 28.12,21.72 28.12,29.49 29.72,31.09 35.2,31.09 | 40.01,31.09 36.12,31.09 35.2,31.09 | 37.72,60.12 35.89,60.12 35.43,59.66 | 45.95,57.38 45.95,55.78 46.63,55.09 | 47.09,46.41 49.05,48.35 49.07,51.93 46.86,53.95 46.86,54.86 C21.2 | 35.2,59.44 35.2,31.09
  Bottom 0.254: 35.66,14.4 D5.A 35.89,14.63 | 32.69,3.89 C10.2 | 19.66,69.95 C17.1 19.55,69.92 18.2,71.27 18.2,71.78 18.18,71.8 18.18,74.81 13.95,79.05 13.95,80.23 T5.C 15.79,80.39 20.75,85.35 26.91,85.35 28.93,87.36 28.93,88.37 29.95,89.38 30.18,89.38 | 30.18,89.38 32.23,89.38 34.75,86.87 36.88,86.87 37.9,85.88 37.88,84.22 38.86,83.21 JP1.5 | 40.06,70.71 40.01,75.67 39.55,76.12 C8.2 | 40.06,70.71 40.06,68.71 39.95,68.6 39.66,68.6 39.4,68.59 37.87,67.07 36.8,67.07 36.33,66.62 36.33,64.71 35.14,63.51 34.53,63.51 34.06,63.01 34.06,61.72 35.2,60.58 35.2,59.66 C18.2 | 47.09,46.18 JP4.4 | C20.2 56.69,67.44 57.46,66.67 57.61,66.52 57.61,64.47 57.15,64.01 57.15,61.95 C22.2 56.92,61.72 v54.86,59.66 50.75,59.66 46.86,55.78 46.86,55.09 C21.2 | 40.06,70.71 43.29,70.7 48.23,75.67 C19.2 | v57.12,50.12 57,50 55.12,50 55,50.12 50.88,50.12 50.88,48.38 52.88,46.38 JP5.4 53,46.25 59.62,39.62 59.62,35 U$1.P$13 | v36.12,27.75 39,24.88 39.11,24.77 | 30.18,89.38 30.2,89.41 T6.C | T7.C 75.69,93.16 77.53,93.16 80.59,90.1 80.59,87.46 85.48,82.56 T8.C
  Bottom 0.406: 35.66,14.4 35.58,13.82 31.23,9.47 31.26,5.27 32.69,3.89 | 40.69,25.24 39.57,25.24 39.11,24.77 35.93,21.48 35.89,14.63 | 83.21,66.59 79.38,62.76 74.93,62.76 JP2.1 79.37,62.8 79.4,62.77 83.16,66.54 83.16,73.27 83.31,73.43 | 83.31,73.43 74.69,73.43 69.32,68.06 58.85,68.06 57.46,66.67 | 83.31,73.43 83.31,74.77 84.89,76.34 T8.C
VCC5  (via drill 0.61)
  Top 0.254: 77.04,75.44 R11.1 | 31.09,82.53 30.86,82.53 | 28.8,82.53 R9.1 | 35.2,78.41 C2.2 | 39.32,86.87 41.09,86.03 | 35.66,24.92 D5.C 35.66,24.69 | 30.4,29.72 D6.A | 30.4,14.17 IC6.2 | 32.46,9.14 C11.2 | 17.83,21.03 IC5.TAB | 30.18,14.4 IC6.2 | 30.4,14.4 IC6.2
  Top 0.305: 22.17,21.03 22.17,21 | 28.3,14.96 28.28,14.94 28.28,14.93
  Top 0.406: 77.04,75.44 75.11,77.36 v75.12,82.3 74.31,82.3 R10.1 | 28.8,82.53 30.86,82.53 30.86,85.27 32.46,86.87 39.32,86.87 | 35.2,78.41 34.77,78.85 34.77,79.29 32.68,81.38 32.23,81.38 31.09,82.53 | v58.99,83.94 57.92,84.98 57.21,85.71 52.9,85.71 52.55,86.04 41.09,86.03 | 35.66,24.92 35.2,24.92 30.4,29.72 | 30.4,11.2 30.4,14.17 | 32.46,9.14 30.4,11.2 | 30.4,11.2 27.31,8.29 | 27.31,8.29 26.73,7.74 | 22.17,21.03 17.83,21.03 | 30.18,14.4 28.8,14.4 28.28,14.93 | 35.66,24.69 35.66,19.66 30.4,14.4 | 22.17,21 23.77,19.4 23.77,17.89 24.51,17.15 27.33,17.15 28.3,16.18 28.3,14.96 | C6.+ 4.62,9.84 6.56,11.78 9.26,11.78 C1.+ 11.09,11.86 13.28,9.67 19.92,9.67 22.57,7.02 26.04,7.02 27.31,8.29 | R8.1 12.1,70 13.01,70.92 13.01,73.86 13.01,75.6 v16.14,78.73
  Bottom 0.254: 35.2,78.18 C2.2 | JP3.15 74.3,10.06 70.64,13.72 53.26,13.72 R18.A 53.03,13.72 45.03,13.72 41.38,10.06 JP3.2 41.15,9.83 39.4,7.77 33.83,7.77 32.69,8.91 C11.2 | 30.63,30.18 30.4,29.95 D6.A
  Bottom 0.406: 32.17,77.05 34.06,77.04 35.2,78.18 | 32.17,77.05 26.66,77.03 26.25,77.03 25.59,76.37 18.49,76.37 v16.14,78.73 | 30.63,30.18 29.66,31.15 29.54,58.17 29.54,58.2 28.54,59.2 25.1,59.2 25,59.3 24.1,60.19 24.1,63.42 25.58,64.92 28.14,64.94 29.22,66.02 29.23,66.2 29.95,66.9 29.95,67.89 29.91,67.92 29.25,69 29.25,71.96 32.18,74.94 32.17,77.05 | v75.12,82.3 69.38,82.3 C9.2 68.03,84.17 67.21,84.99 60.07,84.99 v58.99,83.94
VCC7  (via drill 0.61)
  Top 0.254: 19.89,13.95 IC5.2 20.12,13.95 | 25.83,9.6 C12.2 | 19.89,29.72 D6.C | v33.88,70.88 33.88,69.38 R6.2
  Top 0.61: 19.89,13.95 17.19,13.94 16.02,15.32 14.16,15.24 14.21,17.4 13.98,17.63 13.98,24.72 19.89,29.72 | 25.83,9.6 25.83,10.51 27.07,11.63 27.06,15.22 26.44,15.85 21.79,15.86 20.12,13.95
  Bottom 0.254: 25.6,9.6 C12.2 | 23.09,4.34 JP7.2 23.25,4.12 26,1.38 74.12,1.38 81.12,8.38 81.12,16.25 76.5,20.88 74.88,20.88 74.5,20.5 69.38,20.5 67.62,22.25 67.38,22.25 U$1.P$7 | v33.88,70.88 33.88,66.25 32,64.38 31.98,64.38 31.12,63.52 31.12,59.12 31.88,58.38 31.88,29.62 30.75,28.5 21.38,28.5 20.12,29.75 D6.C
  Bottom 0.406: 21.81,5.66 18.36,2.21 15.88,2.21 12.97,5.12 C27.+
  Bottom 0.61: 25.6,9.6 25.64,9.53 23.94,10.94 22.89,10.95 21.8,10.03 21.81,5.66 23.09,4.34